# Altium PCB Telemetry Hat.PcbDoc
Units mil, origin at the board's own origin, x right, y up, seen from the top; angles counter-clockwise.
Board outline 2558.74 x 2204.72 mil, 2 copper layers (Top Layer, Bottom Layer), stack 61.2 mil thick; 22 components, 43 nets, 128 pads, 12 vias.
Unrouted connection lines stored in the file: 2.
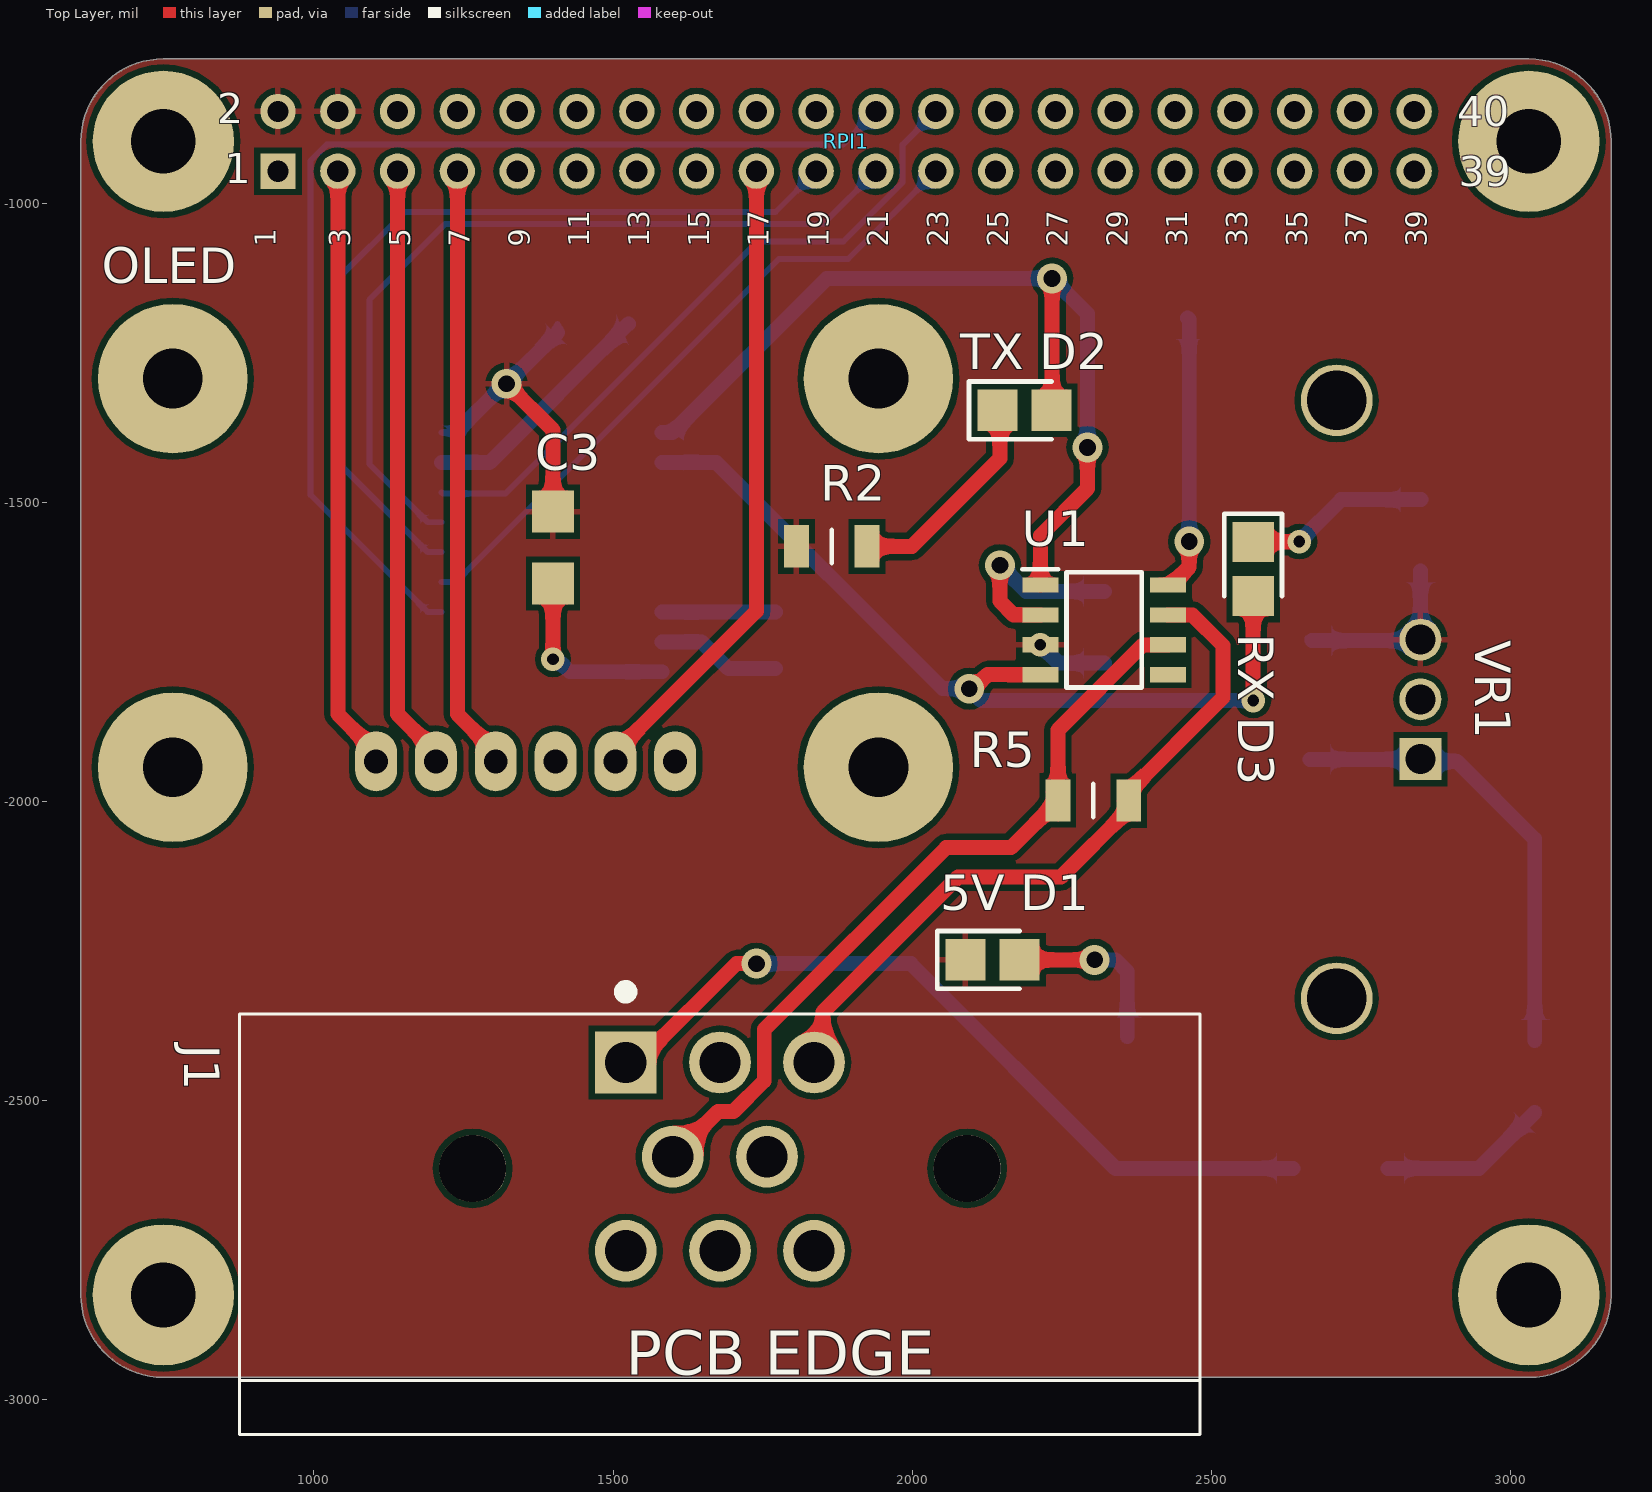
[diagram p0: Top Layer view]
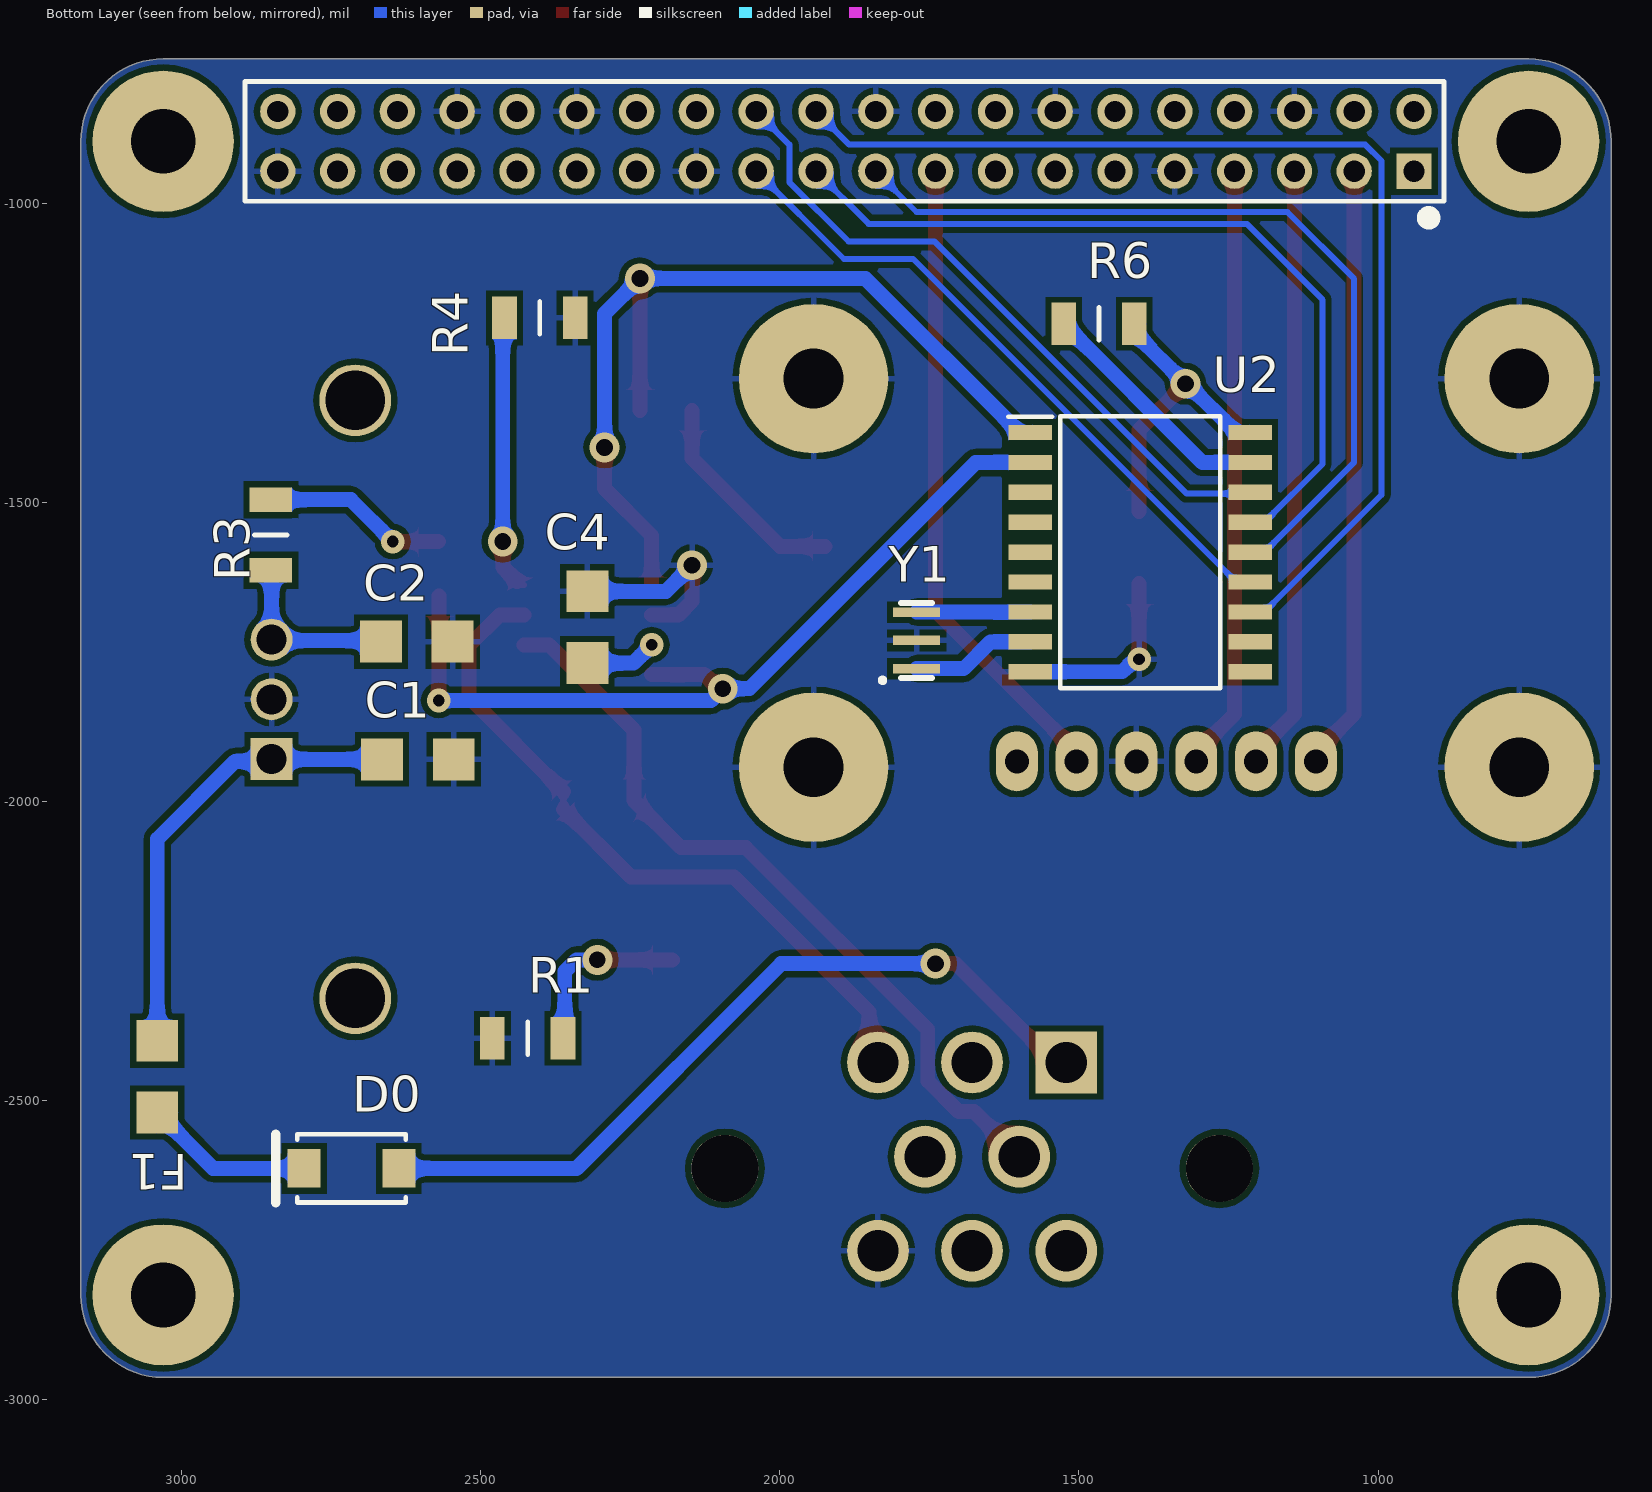
[diagram p1: Bottom Layer view, seen from below]

## Layer stack, top to bottom
Top Solder: solder mask 0.8, Solder Resist, Dk 3.5
Top Layer: signal copper 2.1
Dielectric 1: dielectric 57, FR-4, Dk 4.6
Bottom Layer: signal copper 2.1
Bottom Solder: solder mask 0.8, Solder Resist, Dk 3.5

## Board outline
610.24,-2824.8 ccw(c748.03,-2824.8) 748.03,-2962.6 3031.5,-2962.6 ccw(c3031.34,-2824.96) 3168.98,-2824.8 3168.98,-895.67 ccw(c3031.34,-895.51) 3031.5,-757.87 748.03,-757.87 ccw(c748.03,-895.67) 610.24,-895.67

## Design rules (kind name [scope] priority, off if disabled: settings)
Clearance [All] p1: gap=10 ignorepadtopadclearanceinfootprint=FALSE except(0: Arc-Hole Track-Hole SMDPad-Hole THPad-Hole Via-Hole Fill-Hole Poly-Hole Region-Hole Text-Hole)
Height [All] p1: minheight=0 maxheight=3000 prefheight=500
PolygonConnect [All] p1: connectstyle=Relief reliefconductorwidth=10 reliefentries=4 polygonreliefangle="90 Angle" airgapwidth=10
RoutingVias [All] p1: holewidth=28 width=50 viastyle="Through Hole" minholewidth=28 minwidth=50 maxholewidth=28 maxwidth=50
SolderMaskExpansion [All] p1: expansion=4
Width [All] p1: maxlimit=100 minlimit=10 preferedwidth=10
29 further rules are at their usual default settings.

## Components (designator, comment, footprint, x,y, rotation, side; value= is the part's Value field where it differs from the comment)
"5V D1" "Green" LEDC3216X120NGRN 2134.49,-2264.38 r0 top (schematic designator D1)
C1 "Cap" 1206 2665.43,-1929.13 r180 bottom value=10uF
C2 "Cap" 1206 2547.32,-1732.28 r0 bottom value=10uF
C3 "Cap" 1206 1399.6,-1514.95 r270 top value=1uF
C4 "Cap" 1206 2322.05,-1648.16 r270 bottom value=1uF
D0 "STPS2150A" STM-SMA-2_B_V 2716.53,-2613.18 r0 bottom
F1 "507-1080-1-ND" 1206 3041.34,-2519.68 r90 bottom
J1 "1-776280-1" *TE_1-776280-1 1678.74,-2613.19 r0 top
OLED "OLED 931" OLED 1103.93,-1932.49 r0 top
R1 "10K" RESC3216X60N 2421.89,-2395.62 r0 bottom
R2 "10K" RESC3216X60N 1865.75,-1573.1 r0 top
R3 "10K" RESC3216X60N 2851.34,-1554.02 r270 bottom
R4 "10K" RESC3216X60N 2401.57,-1190.94 r0 bottom
R5 "10K" RESC3216X60N 2303.15,-1998.03 r180 top
R6 "10K" RESC3216X60N 1466.54,-1200.79 r180 bottom
RPI1 "RPI GPIO Connector" rpi 1889.76,-895.67 r180 top
"RX D3" "Yellow" LEDC3216X120NYEL 2570.51,-1610.89 r270 top (schematic designator D3)
"TX D2" "Yellow" LEDC3216X120NYEL 2187.89,-1345.44 r0 top (schematic designator D2)
U1 "MCP2551-E/SN" SOIC127P600X175-8N 2321.34,-1712.6 r0 top
U2 "MCP2515-E/ST" SOIC127P1030X265-18N 1397.64,-1582.68 r180 bottom
VR1 "Volt Reg" Regulator 2850.2,-1928.78 r90 top
Y1 "CSTCE16M0V53-R0" CSTCE_G 1771.65,-1730.32 r270 bottom

## Footprints (in the part's own frame and the unit in brackets; to place one, negate y for a bottom-side part, rotate by r counter-clockwise, add the part's x,y. Pads: shape width x height; smd on the part's side, far side on the other; paste and mask are expansions set on the pad)
1206 [mil]
  rect 70x70 / inner round 0 / far side round 0 all layers, no hole: 1(0,0) 2(120,0)
*TE_1-776280-1 [mm]
  rect 2.625x2.625 hole 1.75: 1(-4,4.5)
  round 2.625 hole 1.75: 2(0,4.5) 3(4,4.5) 4(-2,0.5) 5(2,0.5) 6(-4,-3.5) 7(0,-3.5) 8(4,-3.5)
  round 2.85 hole 2.85 unplated: None(-10.5,0) None(10.5,0)
  silkscreen extent -20.4,-11.3 20.4,7.75, body extent -20.4,-31.07 20.4,6.73, height 27.76
CSTCE_G [mm]
  rect 0.4x2 smd: 1(1.2,0) 2(0,0) 3(-1.2,0)
  silkscreen extent -1.6,-1.52 1.77,0.65, body extent -1.6,-0.65 1.6,0.65, height 0.7
LEDC3216X120NGRN [mm]
  rect 1.7x1.75 smd: 1(-1.15,0) 2(1.15,0)
  silkscreen extent -2.35,-1.22 1.15,1.22, body extent -1.6,-0.8 1.6,0.8, height 1.1
LEDC3216X120NYEL [mm]
  rect 1.7x1.75 smd: 1(-1.15,0) 2(1.15,0)
  silkscreen extent -2.35,-1.22 1.15,1.22, body extent -1.6,-0.8 1.6,0.8, height 1.1
OLED [mil] "Raspberry Pi OLED 931"
  oval 70x100 hole 40: 1(0,0) 2(100,0) 3(200,0) 4(300,0) 5(400,0) 6(500,0)
  round 250 hole 100: 7(-340,-10) 8(-340,640) 9(840,-10) 10(840,640)
  body extent -419,-87 920,720, height 334
Regulator [mil]
  rect 70x70 hole 50: 1(0,0)
  round 70 hole 50: 2(100,0) 3(200,0)
  round 120 hole 100: 4(-400,140) 5(600,140)
  body extent -716,-354 915,630, height 1037
RESC3216X60N [mm]
  rect 1.05x1.8 smd: 1(-1.5,0) 2(1.5,0)
  silkscreen extent 0,-0.7 0,0.7, body extent -1.57,-0.83 1.58,0.77, height 1.2
rpi [mm]
  rect 1.5x1.5 hole 0.9: 1(24.13,1.27)
  round 1.5 hole 0.9: 2(24.13,-1.27) 3(21.59,1.27) 4(21.59,-1.27) 5(19.05,1.27) 6(19.05,-1.27) 7(16.51,1.27) 8(16.51,-1.27) 9(13.97,1.27) 10(13.97,-1.27) 11(11.43,1.27) 12(11.43,-1.27) 13(8.89,1.27) 14(8.89,-1.27) 15(6.35,1.27) 16(6.35,-1.27) 17(3.81,1.27) 18(3.81,-1.27) 19(1.27,1.27) 20(1.27,-1.27) 21(-1.27,1.27) 22(-1.27,-1.27) 23(-3.81,1.27) 24(-3.81,-1.27) 25(-6.35,1.27) 26(-6.35,-1.27) 27(-8.89,1.27) 28(-8.89,-1.27) 29(-11.43,1.27) 30(-11.43,-1.27) 31(-13.97,1.27) 32(-13.97,-1.27) 33(-16.51,1.27) 34(-16.51,-1.27) 35(-19.05,1.27) 36(-19.05,-1.27) 37(-21.59,1.27) 38(-21.59,-1.27) 39(-24.13,1.27) 40(-24.13,-1.27)
  body extent -25.52,-2.63 25.53,2.38, height 8.5
SOIC127P600X175-8N [mm]
  rect 1.525x0.65 smd: 1(-2.712,1.905) 2(-2.712,0.635) 3(-2.712,-0.635) 4(-2.712,-1.905) 5(2.712,-1.905) 6(2.712,-0.635) 7(2.712,0.635) 8(2.712,1.905)
  silkscreen extent -3.47,-2.45 1.6,2.58, body extent -3,-2.45 3,2.45, height 1.75
SOIC127P1030X265-18N [mm]
  rect 1.85x0.65 smd: 1(-4.675,5.08) 2(-4.675,3.81) 3(-4.675,2.54) 4(-4.675,1.27) 5(-4.675,0) 6(-4.675,-1.27) 7(-4.675,-2.54) 8(-4.675,-3.81) 9(-4.675,-5.08) 10(4.675,-5.08) 11(4.675,-3.81) 12(4.675,-2.54) 13(4.675,-1.27) 14(4.675,0) 15(4.675,1.27) 16(4.675,2.54) 17(4.675,3.81) 18(4.675,5.08)
  silkscreen extent -5.6,-5.77 3.4,5.77, body extent -5.15,-5.77 5.15,5.78, height 2.65
STM-SMA-2_B_V [mm] "Molded Diode, 2-Leads, Body 4.6x2.9mm"
  rect 1.4x1.64 smd: 1(-2.015,0) 2(2.015,0)
  silkscreen extent -2.3,-1.45 3.21,1.45, body extent -2.52,-1.45 2.52,1.45, height 2.59

## Part data
"5V D1": library part LED2, "Typical RED, GREEN, YELLOW, AMBER GaAs LED", Case/Package=1206, Case Code (Metric)=3216, Colour=Green,Yellow, Forward Current=20mA, Forward Voltage=2.2V, Lens Colour=White,Clear, Manufacturer="Broadcom Avago", Manufacturer Part Number=HSMG-C150, Max Operating Temperature=85°C, Max Power Dissipation=65mW, Min Operating Temperature=-30°C, Package Quantity=1, Reverse Voltage=5V, Supplier Part Number=732-4993-1-ND, Case Code (Imperial)=1206, ComponentLink1Description=https://datasheet.ciiva.com/11774/0900766b804a6539-11774272.pdf, ComponentLink1URL=https://datasheet.ciiva.com/11774/0900766b804a6539-11774272.pdf, ComponentLink2Description=https://datasheet.ciiva.com/14172/swseriehsmx-c150toc190-e-14172162.pdf, ComponentLink2URL=https://datasheet.ciiva.com/14172/swseriehsmx-c150toc190-e-14172162.pdf, ComponentLink3Description=https://datasheet.ciiva.com/46426/313031-46426517.pdf, ComponentLink3URL=https://datasheet.ciiva.com/46426/313031-46426517.pdf, ComponentLink4Description=https://datasheet.ciiva.com/15117/getdatasheetpartid-110366-15117482.pdf, ComponentLink4URL=https://datasheet.ciiva.com/15117/getdatasheetpartid-110366-15117482.pdf, ComponentLink5Description=https://datasheet.ciiva.com/19466/1556369-19466015.pdf, ComponentLink5URL=https://datasheet.ciiva.com/19466/1556369-19466015.pdf, ComponentLink6Description=https://datasheet.ciiva.com/29280/180668-da-01-en-chip-led-hsmg-c150-gelb-gruen-29280632.pdf, ComponentLink6URL=https://datasheet.ciiva.com/29280/180668-da-01-en-chip-led-hsmg-c150-gelb-gruen-29280632.pdf, Contact Plating=Gold, Depth=1.6mm, Dominant Wavelength=572nm, Height=1.1mm, Illumination Colour=Green, LatestRevisionDate=17-Jul-2002, LatestRevisionNote="Re-released for DXP Platform.", Length=3.2mm, Lens Style=Diffused,Colorless,Rectangular, Lens Transparency=Diffused, Luminous Intensity=15mcd, Mount="Surface Mount", Number of Elements=1, Number of LEDs=1, Number of Pins=2, PackageDescription="SM LED; 2 Flat Leads", PackageReference=3.2X1.6X1.1, PackageVersion=Feb-2002, Packaging="Tape and Reel", Power Dissipation=65mW, Power Rating=65mW, Published=8-Jun-2000, Publisher="Altium Limited", Radiation Hardening=No, REACH SVHC="No SVHC", Supplier 1=Digi-Key, Supplier 2=Digi-Key, Test Current=20mA, Viewing Angle=170°, Wavelength=572nm, Width=1.6mm
C1 C2: "Capacitor", Supplier Part Number 1=445-12903-1-ND, LatestRevisionDate=17-Jul-2002, LatestRevisionNote="Re-released for DXP Platform.", PackageDescription="Radial Cap, Thru-Hole; 2 Leads; 0.3 in Pin Spacing", PackageReference=RAD-0.3, Published=8-Jun-2000, Publisher="Altium Limited", Supplier 1=Digi-Key
C3 C4: "Capacitor", Supplier Part Number 1=445-6989-1-ND, LatestRevisionDate=17-Jul-2002, LatestRevisionNote="Re-released for DXP Platform.", PackageDescription="Radial Cap, Thru-Hole; 2 Leads; 0.3 in Pin Spacing", PackageReference=RAD-0.3, Published=8-Jun-2000, Publisher="Altium Limited", Supplier 1=Digi-Key
D0: library part CMP-2000-07174-1, "Power Schottky Rectifier, 150 V, 2 A, 2-Pin SMD, RoHS, Tape and Reel", Capacitance @ Vr, F=-, Current - Average Rectified (Io)=2A, Current - Reverse Leakage @ Vr=1.5µA@150V, Manufacturer=STMicroelectronics, Operating Temperature - Junction=175°C(Max), Package / Case=DO-214AC,SMA, Package Description="2-Pin Surface Mount Device, Body 4.275 x 2.575 mm", Package Reference=SMA, Standard Package=1, Supplier Device Package=SMA(DO-214AC), Voltage - DC Reverse (Vr) (Max)=150V, Voltage - Forward (Vf) (Max) @ If=820mV@2A, Category=DiscreteSemiconductorProducts, Datasheet URL=http://www.st.com/content/ccc/resource/technical/document/datasheet/61/59/17/ff/5b/58/43/45/CD00003322.pdf/files/CD00003322.pdf/jcr:content/translations/en.CD00003322.pdf, Datasheet Version="Rev. 6, 09/2008", Diode Type=Schottky, Family=Diodes,Rectifiers-Single, Manufacturer URL=http://www.st.com/, Mounting Technology=SurfaceMount, Mounting Type=SurfaceMount, Online Catalog=SchottkyDiode, Other Names=497-2467-6, Other Related Documents=STPS2150ViewAllSpecifications, Packaging=Digi-Reel®, Reverse Recovery Time (trr)=-, Series=-, Speed=FastRecovery=200mA(Io)
F1: library part "Fuse 1", "Fuse", ComponentLink1Description=digikey, ComponentLink1URL=https://www.digikey.ca/product-detail/en/bel-fuse-inc/0686F2500-01/507-2151-1-ND/7427703, LatestRevisionDate=17-Jul-2002, LatestRevisionNote="Re-released for DXP Platform.", PackageDescription="Thru-Hole; 2 Leads", PackageReference=PIN-W2/E2.8, Published=8-Jun-2000, Publisher="Altium Limited"
J1: "AMPSEAL 8 Position Three Row 0.157 inch Right Angle Sealed Pin Header", Package=None, Digi-Key_Part_Number=1734-1-776280-1-ND, Digi-Key_Purchase_URL=https://www.digikey.com/product-detail/en/te-connectivity-deutsch-connectors/1-776280-1/1734-1-776280-1-ND/5428578?utm_source=snapeda&utm_medium=aggregator&utm_campaign=symbol, EU_RoHS_Compliance=Compliant, MF="TE Connectivity", MP=1-776280-1, SnapEDA_Link=https://www.snapeda.com/parts/1-776280-1/TE%20Connectivity%20AMP%20Connectors/view-part/1263371/?ref=snap, TE_purchase_URL=https://www.te.com/usa-en/product-1-776280-1.html?te_bu=Cor&te_type=disp&te_campaign=seda_glo_cor-seda-global-disp-prtnr-fy19-seda-model-bom-cta_sma-317_1&elqCampaignId=32493
OLED: library part "OLED Adafruit 931"
R1 R2 R3 R4 R5 R6: library part Res1, "Resistor", Case/Package=1206, Case Code (Metric)=3216, Manufacturer="Stackpole Electronics", Manufacturer Part Number=RNCP1206FTD1K00, Max Operating Temperature=155°C, Max Power Dissipation=500mW, Min Operating Temperature=-55°C, Resistance=10kR, Supplier Part Number=RNCP1206FTD10K0CT-ND, Temperature Coefficient=100ppm/°C, Tolerance=1%, Case Code (Imperial)=1206, ComponentLink1Description=http://www.seielect.com/Catalog/SEI-rncp.pdf, ComponentLink1URL=http://www.seielect.com/Catalog/SEI-rncp.pdf, ComponentLink2Description=https://www.seielect.com/catalog/SEI-Packaging.pdf, ComponentLink2URL=https://www.seielect.com/catalog/SEI-Packaging.pdf, Composition="Thin Film", Contact Plating=Nickel,Tin,Matte, Height=0.024inch, Lead Free="Lead Free", Length=0.122inch, Mount="Surface Mount", Number of Terminations=2, Packaging="Tape and Reel", Pricing 1="1=0.1, 10=0.052, 100=0.0211, 1000=0.00949, 2500=0.00824 (USD)", Radiation Hardening=No, Stock 1=679, Supplier 1=Digi-Key, Width=0.059inch
RPI1: library part "rpi connector", "GPIO Header for Raspberry Pi A+/B+/Pi 2/Pi 3 - 2x20", Manufacturer="SparkFun Electronics", Manufacturer Part Number=PRT-14017, Supplier Part Number 1=1568-1462-ND, Accessory Type=Connector, Category="Development Boards, Kits, Programmers", ComponentLink1Description=https://cdn.sparkfun.com/datasheets/Dev/RaspberryPi/12313.pdf, ComponentLink1URL=https://cdn.sparkfun.com/datasheets/Dev/RaspberryPi/12313.pdf, For Use With/Related Products="Raspberry Pi", Nils Minor=author, nilsminor@web.de=mail, Part Status=Active, Pricing 1="1=1.84 (EUR)", RoHS="RoHS Compliant", Stock 1=150, Supplier 1=Digi-Key
"RX D3" "TX D2": library part LED2_1, "Typical RED, GREEN, YELLOW, AMBER GaAs LED", Case/Package=1206, Case Code (Metric)=3216, Forward Current=20mA, Forward Voltage=2.1V, Lens Colour=White,Clear, Manufacturer="Broadcom Avago", Manufacturer Part Number=HSMY-C150, Max Operating Temperature=85°C, Max Power Dissipation=65mW, Min Operating Temperature=-40°C, Package Quantity=1, Reverse Voltage=5V, Supplier Part Number=732-4994-1-ND, Case Code (Imperial)=1206, Colour=Yellow, ComponentLink1Description=https://datasheet.ciiva.com/15117/getdatasheetpartid-110528-15117488.pdf, ComponentLink1URL=https://datasheet.ciiva.com/15117/getdatasheetpartid-110528-15117488.pdf, ComponentLink2Description=https://datasheet.ciiva.com/11774/0900766b804a6539-11774578.pdf, ComponentLink2URL=https://datasheet.ciiva.com/11774/0900766b804a6539-11774578.pdf, ComponentLink3Description=https://datasheet.ciiva.com/19466/1557071-19466435.pdf, ComponentLink3URL=https://datasheet.ciiva.com/19466/1557071-19466435.pdf, ComponentLink4Description=https://datasheet.ciiva.com/14172/swseriehsmx-c150toc190-e-14172159.pdf, ComponentLink4URL=https://datasheet.ciiva.com/14172/swseriehsmx-c150toc190-e-14172159.pdf, ComponentLink5Description=https://datasheet.ciiva.com/29280/180507-da-01-en-chip-led-hsmy-c150-gelb-29280997.pdf, ComponentLink5URL=https://datasheet.ciiva.com/29280/180507-da-01-en-chip-led-hsmy-c150-gelb-29280997.pdf, Contact Plating=Gold, Depth=1.6mm, Dominant Wavelength=586nm, Height=1.1mm, Illumination Colour=Yellow, LatestRevisionDate=17-Jul-2002, LatestRevisionNote="Re-released for DXP Platform.", Lead Free="Lead Free", Length=3.2mm, Lens Style=Diffused,Colorless,Rectangular, Lens Transparency=Diffused, Luminous Intensity=8mcd, Mount="Surface Mount", Number of Elements=1, Number of LEDs=1, Number of Pins=2, PackageDescription="SM LED; 2 Flat Leads", PackageReference=3.2X1.6X1.1, PackageVersion=Feb-2002, Packaging="Tape and Reel", Power Dissipation=65mW, Power Rating=65mW, Published=8-Jun-2000, Publisher="Altium Limited", Radiation Hardening=No, REACH SVHC="No SVHC", Stock 1=0, Supplier 1=Digi-Key, Supplier 2=Digi-Key, Test Current=20mA, Viewing Angle=170°, Voltage Rating (DC)=2.1V, Wavelength=586nm, Width=1.6mm
U1: "SOIC", Supplier Part Number=MCP2551T-E/SNCT-ND, Supplier 1=Digi-Key
U2: "SOIC", Supplier Part Number=MCP2515T-I/SOCT-ND, Supplier 1=Digi-Key
VR1: "Voltage Regulator", Supplier Part Number 1=296-14324-5-ND, LatestRevisionDate=29-May-2009, LatestRevisionNote="IPC-7351 Footprint Added.", PackageDescription="3-Pin Transistor Outline Package 2.54 mm Pitch, 15.1 mm Lead Span", PackageReference=D2PAK, Published=24-Mar-1999, Publisher="Altium Limited", Supplier 1=Digi-Key
Y1: Capacitance=15pF, Case/Package=SMD/SMT, Frequency=16MHz, Frequency Stability=0.15%, Frequency Tolerance=0.5%, Manufacturer=Murata, Manufacturer Part Number=CSTCE16M0V53C-R0, Max Operating Temperature=125°C, Min Operating Temperature=-40°C, Package Quantity=3000, Supplier Part Number=490-17948-1-ND, ComponentLink1Description=https://datasheet.ciiva.com/16430/cstce16m0v53c-r0-16430704.pdf, ComponentLink1URL=https://datasheet.ciiva.com/16430/cstce16m0v53c-r0-16430704.pdf, ComponentLink2Description=https://datasheet.ciiva.com/14132/ceralock-eng-bro-14132709.pdf, ComponentLink2URL=https://datasheet.ciiva.com/14132/ceralock-eng-bro-14132709.pdf, ComponentLink3Description=https://datasheet.ciiva.com/29617/l0430e-29617948.pdf, ComponentLink3URL=https://datasheet.ciiva.com/29617/l0430e-29617948.pdf, ComponentLink4Description=https://datasheet.ciiva.com/29617/l0430e-29617949.pdf, ComponentLink4URL=https://datasheet.ciiva.com/29617/l0430e-29617949.pdf, ComponentLink5Description=https://datasheet.ciiva.com/29617/l0430e-29617950.pdf, ComponentLink5URL=https://datasheet.ciiva.com/29617/l0430e-29617950.pdf, ComponentLink6Description=https://datasheet.ciiva.com/26812/getdatasheetpartid-418508-26812063.pdf, ComponentLink6URL=https://datasheet.ciiva.com/26812/getdatasheetpartid-418508-26812063.pdf, Composition=Ceramic, Contact Plating=Gold, Height=0.031inch, Lead Free="Lead Free", Length=0.126inch, Mount="Surface Mount", Number of Pins=3, Packaging="Tape and Reel", REACH SVHC="No SVHC", Stock 1=0, Supplier 1=Digi-Key, Termination=SMD/SMT, Tolerance=0.5%, Width=0.051inch

## Free pads (board coordinates)
  round 236.22 hole 108.27: ""(748.03,-2824.8) ""(748.03,-895.67) ""(3031.5,-2824.8) ""(3031.5,-895.67)

## Via types
v1: diameter 50, hole 28, Top Layer to Bottom Layer, 8 vias
v2: diameter 39.37, hole 19.68, Top Layer to Bottom Layer, 4 vias

## Nets (pads, with @x,y where several pads share a name; then routed paths per layer and width w, separated by ;. In a path a pad name is that pad's centre, name@x,y a point inside that pad or via, vN(x,y) a via of type N, cw(c..) or ccw(c..) an arc to the next point about the centre after c; other vN are vias at no path point)
+3V3: OLED.5 RPI1.1 RPI1.17 | length 1084.5
  Top Layer w10: OLED.5 OLED.5@1503.93,-1917.49
  Top Layer w25: OLED.5@1503.93,-1917.49 1739.76,-1681.66 RPI1.17
+5V: "5V D1.1" C2.2 C3.1 C4.2 R2.1 R3.2 R6.2 RPI1.2 RPI1.4 U1.3 U2.18 VR1.3 | length 955.2
  Top Layer w10: U1.3@2212.89,-1735.93 v2(2214.57,-1737.6)
  Top Layer w25: v1(1322.05,-1300.98) 1399.6,-1378.54 C3.1
  Bottom Layer w10: U2.18 U2.18@1237.2,-1382.68 ; v1@1318.9,-1300.98 v1(1322.05,-1300.98) ; R6.2@1407.48,-1215.55 R6.2 ; C2.2@2660.98,-1725.95 C2.2 C2.2@2669.07,-1730.53 ; R3.2@2850.2,-1614.22 R3.2
  Bottom Layer w25: U2.18@1237.2,-1382.68 v1@1318.9,-1300.98 ; v1(1322.05,-1300.98) R6.2@1407.48,-1215.55 ; v2(2214.57,-1737.6) 2245.13,-1768.16 C4.2 ; C2.2@2669.07,-1730.53 VR1.3@2850.2,-1730.53 ; VR1.3 R3.2@2850.2,-1614.22
+12V: D0.1 J1.1 | length 1292.6
  Top Layer w25: J1.1@1550.79,-2426.18 1706.15,-2270.82 v1(1739.76,-2270.82)
  Bottom Layer w25: v1(1739.76,-2270.82) 1998.03,-2270.82 2340.39,-2613.18 D0.1
CANH: J1.3 R5.1 U1.7 | length 1194.2
  Top Layer w10: R5.1@2362.2,-2012.8 R5.1 R5.1@2362.2,-1983.27
  Top Layer w25: J1.3 1851.21,-2421.03 1851.21,-2351.54 2076.77,-2125.98 2249.02,-2125.98 R5.1@2362.2,-2012.8 ; R5.1@2362.2,-1983.27 2519.68,-1825.79 2519.68,-1738.54 2468.74,-1687.6 U1.7
CANL: J1.4 R5.2 U1.6 | length 1317.6
  Top Layer w10: J1.4@1629.53,-2583.66 J1.4@1645.08,-2583.66
  Top Layer w25: J1.4 1675.44,-2518.06 1701.6,-2518.06 1752.91,-2466.75 1752.91,-2380.94 2057.09,-2076.77 2165.35,-2076.77 R5.2 2244.09,-1879.92 2386.42,-1737.6 U1.6
GND: C1.2 C2.1 C3.2 C4.1 J1.8 OLED.4 OLED.7 OLED.8 OLED.9 OLED.10 R1.2 R4.1 RPI1.6 RPI1.9 RPI1.14 RPI1.20 RPI1.25 RPI1.30 RPI1.34 RPI1.39 U1.2 U2.9 VR1.2 Y1.2 | length 647.9
  Top Layer w25: v2(1399.6,-1761.81) C3.2 ; v1(2146.97,-1604.59) 2146.97,-1664.68 2169.88,-1687.6 U1.2
  Bottom Layer w10: v2(1399.6,-1761.81) v2@1406.92,-1761.81
  Bottom Layer w25: v2@1406.92,-1761.81 1427.79,-1782.68 U2.9 ; v1(2146.97,-1604.59) 2190.53,-1648.16 C4.1
NetC1_1: C1.1 F1.2 VR1.1 | length 764.9
  Bottom Layer w10: C1.1 C1.1@2666.83,-1930.53 ; VR1.1@2849.85,-1929.13 VR1.1
  Bottom Layer w25: C1.1 VR1.1@2849.85,-1929.13 ; VR1.1@2854.33,-1932.49 2911.21,-1932.49 3041.34,-2062.62 F1.2
NetD0_2: D0.2 F1.1 | length 284.2
  Bottom Layer w25: D0.2 2947.84,-2613.18 F1.1
NetD1_2: "5V D1.2" R1.1 | length 301.2
  Top Layer w25: 2179.76,-2264.38 v1(2305.39,-2264.38)
  Bottom Layer w10: R1.1@2359.88,-2392.67 R1.1
  Bottom Layer w25: v1(2305.39,-2264.38) 2340.5,-2264.38 2359.88,-2283.77 R1.1@2359.88,-2392.67
NetD2_1: "TX D2.1" R2.2 | length 363.6
  Top Layer w25: R2.2 1999.74,-1573.1 2146.97,-1425.87 2146.97,-1345.44
NetD3_1: "RX D3.1" R3.1 | length 310.1
  Top Layer w10: 2570.51,-1565.62 2571.17,-1564.96
  Top Layer w25: 2571.17,-1564.96 v2(2647.64,-1564.96)
  Bottom Layer w25: v2(2647.64,-1564.96) 2717.63,-1494.97 R3.1
NetOLED_1: OLED.1 RPI1.3 | length 1013.4
  Top Layer w10: OLED.1 OLED.1@1103.93,-1917.49
  Top Layer w25: RPI1.3 1039.76,-1853.32 OLED.1@1103.93,-1917.49
NetOLED_2: OLED.2 RPI1.5 | length 1013.4
  Top Layer w10: OLED.2 OLED.2@1203.93,-1917.49
  Top Layer w25: RPI1.5 1139.76,-1853.32 OLED.2@1203.93,-1917.49
NetOLED_3: OLED.3 RPI1.7 | length 1013.4
  Top Layer w10: OLED.3 OLED.3@1303.93,-1917.49
  Top Layer w25: RPI1.7 1239.76,-1853.32 OLED.3@1303.93,-1917.49
NetR6_1: R6.1 U2.17 | length 408.1
  Bottom Layer w25: U2.17 1293.7,-1432.68 R6.1
NetRPI1_8: RPI1.8
NetRPI1_10: RPI1.10
NetRPI1_11: RPI1.11
NetRPI1_12: RPI1.12
NetRPI1_13: RPI1.13
NetRPI1_15: RPI1.15
NetRPI1_16: RPI1.16
NetRPI1_18: RPI1.18
NetRPI1_19: RPI1.19 U2.14 | length 1417.4
  Bottom Layer w10: U2.14 1189.96,-1582.68 1039.76,-1432.48 1039.76,-1125.59 1151.57,-1013.78 1771.65,-1013.78 RPI1.19
NetRPI1_21: RPI1.21 U2.15 | length 1372.3
  Bottom Layer w10: U2.15 1189.96,-1532.68 1092.52,-1435.24 1092.52,-1160.63 1219.37,-1033.78 1851.65,-1033.78 RPI1.21
NetRPI1_22: RPI1.22 U2.12 | length 1839
  Bottom Layer w10: U2.12 1189.96,-1682.68 994.09,-1486.81 994.09,-928.37 1021.32,-901.14 1884.29,-901.14 RPI1.22
NetRPI1_23: RPI1.23 U2.13 | length 1110.7
  Bottom Layer w10: U2.13 1237.2,-1632.68 1777.36,-1092.52 1892.91,-1092.52 RPI1.23
NetRPI1_24: RPI1.24 U2.16 | length 1128.6
  Bottom Layer w10: U2.16 1215.65,-1484.74 1319.98,-1484.74 1741.73,-1062.99 1885.41,-1062.99 1984.29,-964.11 1984.29,-901.14 RPI1.24
NetRPI1_26: RPI1.26
NetRPI1_29: RPI1.29
NetRPI1_31: RPI1.31
NetRPI1_32: RPI1.32
NetRPI1_33: RPI1.33
NetRPI1_35: RPI1.35
NetRPI1_36: RPI1.36
NetRPI1_37: RPI1.37
NetRPI1_38: RPI1.38
NetRPI1_40: RPI1.40
NetU2_7: U2.7 Y1.3 | length 190.1
  Bottom Layer w10: U2.7 U2.7@1581.89,-1682.87 ; Y1.3@1771.46,-1682.87 Y1.3
  Bottom Layer w25: U2.7@1581.89,-1682.87 Y1.3@1771.46,-1682.87
NetU2_8: U2.8 Y1.1 | length 208.6
  Bottom Layer w25: U2.8 1648.03,-1732.68 1692.91,-1777.56 Y1.1
RS: R4.2 U1.8 | length 477.5
  Top Layer w10: U1.8 2445.33,-1637.6 U1.8@2439.45,-1631.72
  Top Layer w25: U1.8@2439.45,-1631.72 2463.58,-1607.59 v1(2463.58,-1564.96)
  Bottom Layer w25: R4.2 2463.58,-1193.9 v1(2463.58,-1564.96)
RXCAN: "RX D3.2" U1.4 U2.2 | length 1456.7
  Top Layer w25: v1(2095.79,-1811.02) 2102.55,-1811.02 2125.98,-1787.6 U1.4 ; v2(2570.51,-1830.71) 2570.51,-1656.17
  Bottom Layer w25: U2.2 1672.83,-1432.68 2051.18,-1811.02 v1(2095.79,-1811.02) 2115.47,-1830.71 v2(2570.51,-1830.71)
TXCAN: "TX D2.2" U1.1 U2.1 | length 1549.4
  Top Layer w25: U1.1 2214.57,-1555.12 2293.31,-1476.38 v1(2293.31,-1407.48) ; 2234.25,-1345.44 v1(2234.25,-1124.98)
  Bottom Layer w25: U2.1 1599.61,-1382.68 1857.3,-1124.98 v1(2234.25,-1124.98) 2293.31,-1184.04 v1(2293.31,-1407.48)
pads on no net: J1.2 J1.5 J1.6 J1.7 J1.None OLED.6 RPI1.27 RPI1.28 U1.5 U2.3 U2.4 U2.5 U2.6 U2.10 U2.11 VR1.4 VR1.5

## Polygon pours and split planes (outlines as drawn)
GND on Bottom Layer "Bottom GND" (solid, pour order 3): 610.24,-2824.8 ccw(c748.03,-2824.8) 748.03,-2962.6 3031.5,-2962.6 ccw(c3031.34,-2824.96) 3168.98,-2824.8 3168.98,-895.67 ccw(c3031.34,-895.51) 3031.5,-757.87 748.03,-757.87 ccw(c748.03,-895.67) 610.24,-895.67
+5V on Top Layer "Top Layer 5V" (solid, pour order 4): 610.24,-2824.8 ccw(c748.03,-2824.8) 748.03,-2962.6 3031.5,-2962.6 ccw(c3031.34,-2824.96) 3168.98,-2824.8 3168.98,-895.67 ccw(c3031.34,-895.51) 3031.5,-757.87 748.03,-757.87 ccw(c748.03,-895.67) 610.24,-895.67

## Silkscreen, mask and mechanical layers (free items; w line width, h text height)
Top Overlay:
  text "1" at 935.63,-1072.05 h35 r90
  text "3" at 1060.63,-1072.05 h35 r90
  text "5" at 1160.63,-1072.05 h35 r90
  text "7" at 1260.63,-1072.05 h35 r90
  text "9" at 1360.63,-1072.05 h35 r90
  text "11" at 1460.63,-1072.05 h35 r90
  text "13" at 1560.63,-1072.05 h35 r90
  text "15" at 1660.63,-1072.05 h35 r90
  text "17" at 1760.63,-1072.05 h35 r90
  text "19" at 1860.63,-1072.05 h35 r90
  text "21" at 1960.63,-1072.05 h35 r90
  text "23" at 2060.63,-1072.05 h35 r90
  text "25" at 2160.63,-1072.05 h35 r90
  text "27" at 2260.63,-1072.05 h35 r90
  text "29" at 2360.63,-1072.05 h35 r90
  text "31" at 2460.63,-1072.05 h35 r90
  text "33" at 2560.63,-1072.05 h35 r90
  text "35" at 2660.63,-1072.05 h35 r90
  text "37" at 2760.63,-1072.05 h35 r90
  text "39" at 2860.63,-1072.05 h35 r90
Bottom Overlay:
  circle w19.68: c915.35,-1023.62 r9.84
M2: Outline:
  the board outline again, w10

## Text inside footprints (layer, text, board x,y; h text height)
J1: Top Overlay "PCB EDGE" at 1521.13,-2957.94 h73.82; Mechanical 4 "PCB EDGE" at 1521.07,-2958.07 h73.82; Mechanical 4 "PCB EDGE" at 1521.07,-2958.07 h73.82
RPI1: Top Overlay "2" at 838.58,-865.16 h50; Top Overlay "1" at 850.39,-965.55 h50; Top Overlay "39" at 2914.37,-970.47 h50; Top Overlay "40" at 2911.42,-870.08 h50